# Altium PCB MAGI's7SegmentDisplay.PcbDoc
Units mil, origin at the board's own origin, x right, y up, seen from the top; angles counter-clockwise.
Board outline 6000 x 4000 mil, 2 copper layers (Top Layer, Bottom Layer); 16 components, 27 nets, 94 pads, 26 vias.
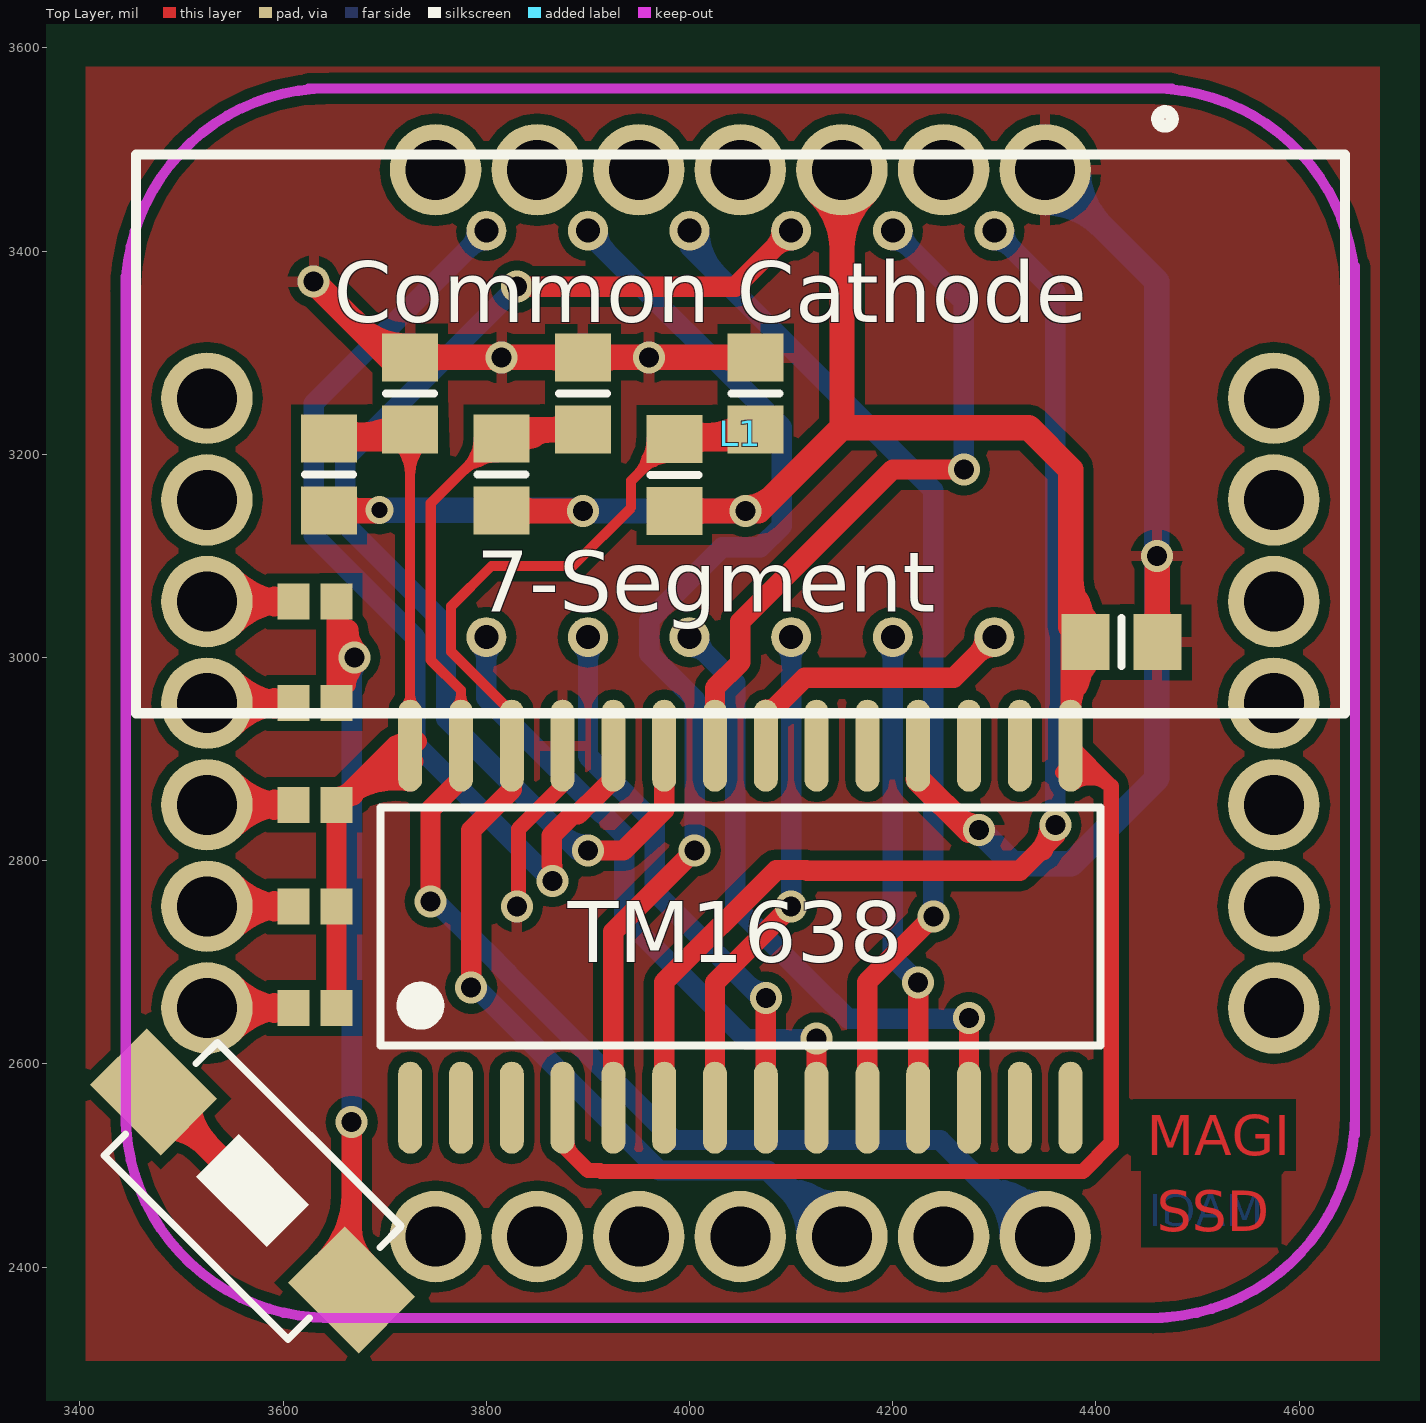
[diagram p0: Top Layer view]
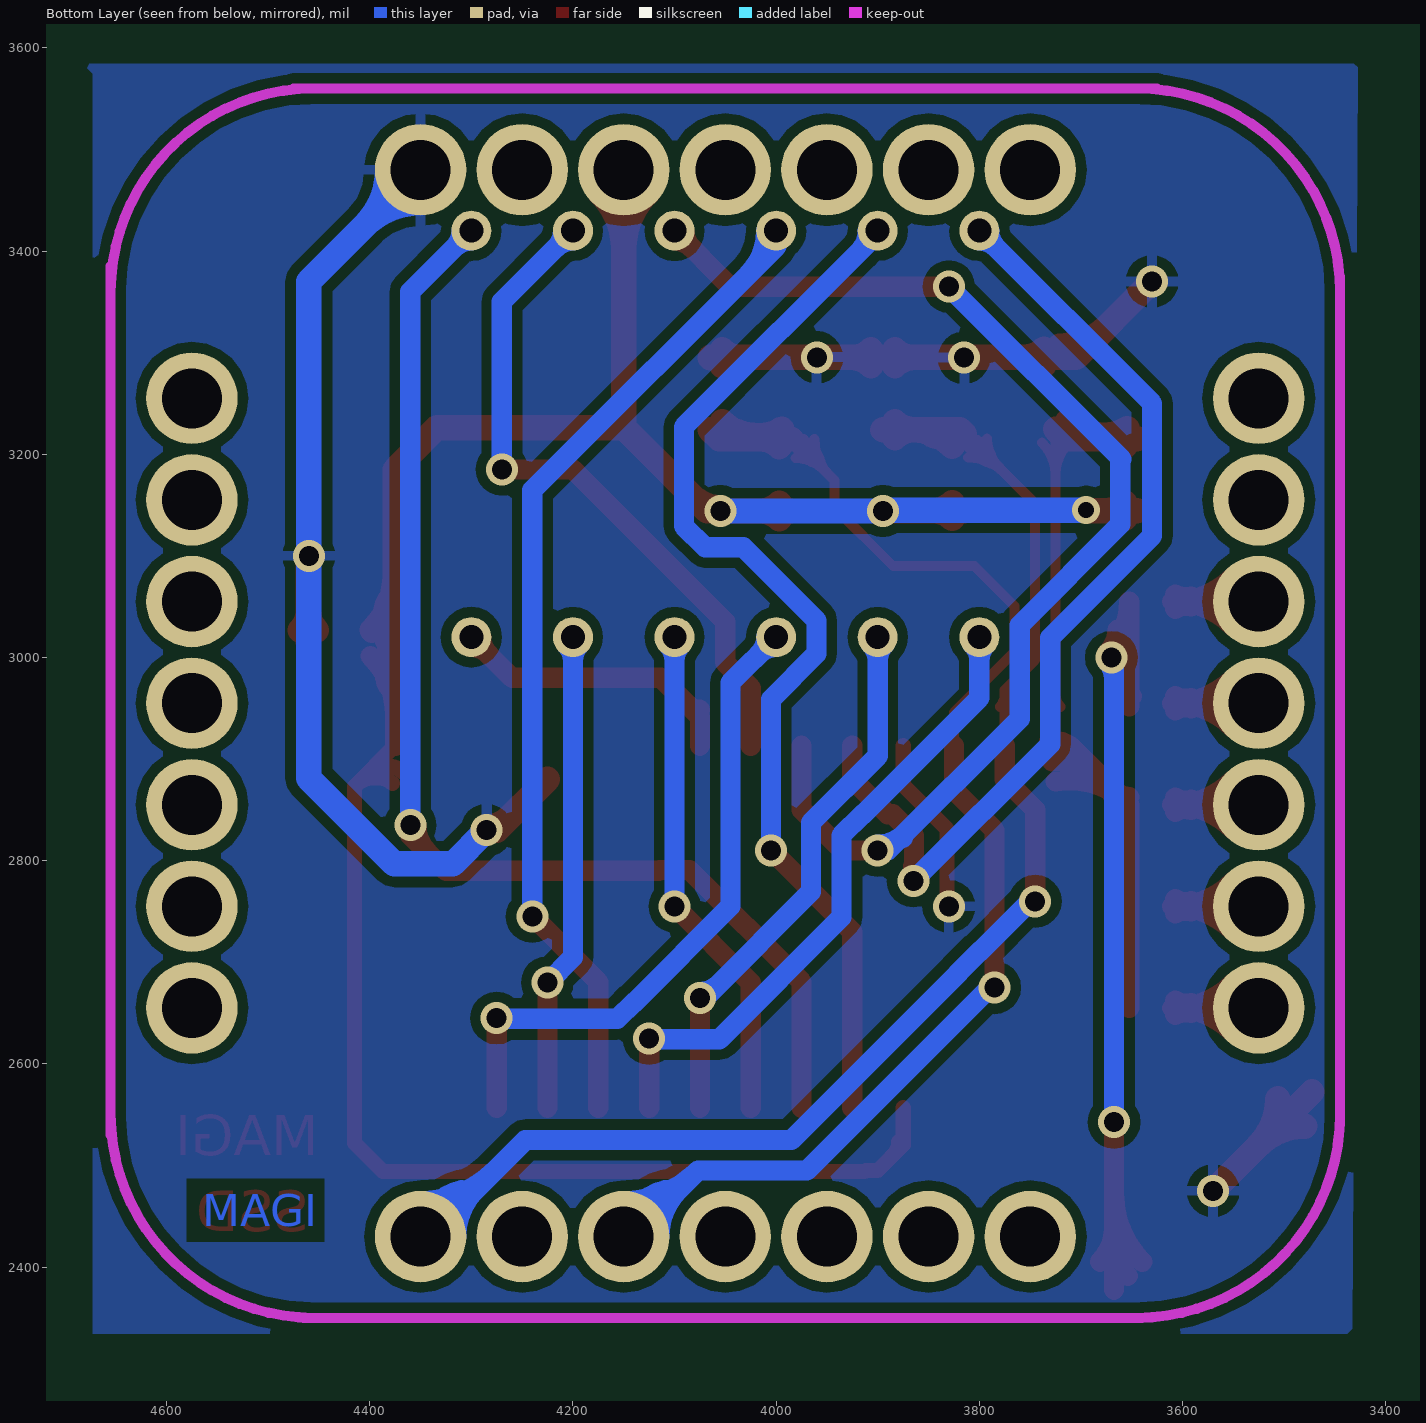
[diagram p1: Bottom Layer view, seen from below]

## Layer stack, top to bottom
Top Solder: solder mask 0.4, Solder Resist, Dk 3.5
Top Layer: signal copper 1.4
Dielectric1: dielectric 12.6, FR-4, Dk 4.8
Bottom Layer: signal copper 1.4
Bottom Solder: solder mask 0.4, Solder Resist, Dk 3.5

## Board outline
1000,1000 7000,1000 7000,5000 1000,5000

## Design rules (kind name [scope] priority, off if disabled: settings)
Clearance [All] p1: gap=10
PolygonConnect [All] p1: connectstyle=Relief reliefconductorwidth=10 reliefentries=4 polygonreliefangle="90 Angle" airgapwidth=10
RoutingVias [All] p1: holewidth=19.68 width=50 viastyle="Through Hole" minholewidth=11.81 minwidth=19.68 maxholewidth=3937.01 maxwidth=3937.01
SolderMaskExpansion [All] p1: expansion=4
Width [All] p1: maxlimit=100 minlimit=10 preferedwidth=30
29 further rules are at their usual default settings.

## Components (designator, comment, footprint, x,y, rotation, side; value= is the part's Value field where it differs from the comment)
C1 "CAP_1" 6-0805_N 3725,3260 r90 top
C2 "CAP_1" 6-0805_N 3895,3259.57 r270 top
C3 "CAP_1" 6-0805_N 4065,3259.57 r270 top
C4 "CAP_1" 6-0805_N 4425,3015 r0 top
J1 "MAGI-M8" MAGI-M8 4050,2955 r0 top
L1 "LED4" "0.36\"LED" 4050,3220 r0 top
R1 "RES1" 6-0805_N 3645,3180 r270 top
R2 "RES1" 6-0805_N 3815,3180 r270 top
R3 "RES1" 6-0805_N 3985,3179.57 r270 top
R4 "RES1" 1608[0603] 3625,2855 r180 top
R5 "RES1" 1608[0603] 3625,2755 r180 top
R6 "RES1" 1608[0603] 3625,2655 r180 top
R7 "RES1" 1608[0603] 3625,3055 r180 top
R8 "RES1" 1608[0603] 3625,2955 r180 top
S1 "SW-PB" SW-1-SMD 3570,2475 r45 top
U1 "TM1638" TM1638 4050,2735 r90 top

## Footprints (in the part's own frame and the unit in brackets; to place one, negate y for a bottom-side part, rotate by r counter-clockwise, add the part's x,y. Pads: shape width x height; smd on the part's side, far side on the other; paste and mask are expansions set on the pad)
"0.36\"LED" [mm]
  round 1 hole 0.6: 1(-6.35,-5.08) 2(-3.81,-5.08) 3(-1.27,-5.08) 4(1.27,-5.08) 5(3.81,-5.08) 6(6.35,-5.08) 7(6.35,5.08) 8(3.81,5.08) 9(1.27,5.08) 10(-1.27,5.08) 11(-3.81,5.08) 12(-6.35,5.08)
  silkscreen extent -15.11,-6.98 15.11,6.98
6-0805_N [mm] "Chip Resistor, Body 2.0x1.2mm, IPC Medium Density"
  rect 1.2x1.4 smd: 1(-0.9,0) 2(0.9,0)
  silkscreen extent 0,-0.6 0,0.6, body extent -1.07,-0.7 1.07,0.7, height 0.7
1608[0603] [mm] "Chip Capacitor, Body 1.6x0.8mm, IPC High Density"
  rect 0.8x0.9 smd: 1(-0.7,0) 2(0.381,0)
  body extent -0.87,-0.48 0.87,0.48, height 1.3
MAGI-M8 [mil]
  round 90 hole 59.06: 1(300,525) 2(200,525) 3(100,525) 4(0,525) 5(-100,525) 6(-200,525) 7(-300,525) 8(-525,300) 9(-525,200) 10(-525,100) 11(-525,0) 12(-525,-100) 13(-525,-200) 14(-525,-300) 15(-300,-525) 16(-200,-525) 17(-100,-525) 18(0,-525) 19(100,-525) 20(200,-525) 21(300,-525) 22(525,-300) 23(525,-200) 24(525,-100) 25(525,0) 26(525,100) 27(525,200) 28(525,300)
  Keep-Out Layer lines w10: -605,-415 -605,290 -605,420 ; -605,-405 ccw(c-405,-405) -405,-605 ; -605,405 cw(c-405,405) -405,605 ; -425,605 425,605 ; -410,-605 415,-605 ; 405,-605 ccw(c405,-405) 605,-405 ; 405,605 cw(c405,405) 605,405 ; 605,-425 605,430
SW-1-SMD [mm]
  rect 2x2.5 smd: 1(0,3.5) 2(0,-3.5)
  silkscreen extent -2,-3.25 2,3.25
TM1638 [mm] "SOIC, 28-Leads, Body 17.93x7.52mm, Pitch 1.27mm, IPC Medium Density"
  oval 2.3x0.6 smd: 1(-4.525,8.255) 2(-4.525,6.985) 3(-4.525,5.715) 4(-4.525,4.445) 5(-4.525,3.175) 6(-4.525,1.905) 7(-4.525,0.635) 8(-4.525,-0.635) 9(-4.525,-1.905) 10(-4.525,-3.175) 11(-4.525,-4.445) 12(-4.525,-5.715) 13(-4.525,-6.985) 14(-4.525,-8.255) 15(4.525,-8.255) 16(4.525,-6.985) 17(4.525,-5.715) 18(4.525,-4.445) 19(4.525,-3.175) 20(4.525,-1.905) 21(4.525,-0.635) 22(4.525,0.635) 23(4.525,1.905) 24(4.525,3.175) 25(4.525,4.445) 26(4.525,5.715) 27(4.525,6.985) 28(4.525,8.255)
  silkscreen extent -2.98,-9 2.98,9, body extent -3.8,-9 3.8,9, height 2.44

## Part data
C1 C2 C3 C4: "Capacitor"

## Via types
v1: diameter 31.5, hole 19.68, Top Layer to Bottom Layer, 25 vias
v2: diameter 27.56, hole 15.75, Top Layer to Bottom Layer, 1 vias

## Nets (pads, with @x,y where several pads share a name; then routed paths per layer and width w, separated by ;. In a path a pad name is that pad's centre, name@x,y a point inside that pad or via, vN(x,y) a via of type N, cw(c..) or ccw(c..) an arc to the next point about the centre after c; other vN are vias at no path point)
CLK: C2.2 J1.21 R2.1 U1.27 | length 3803.1
  Top Layer w10: U1.27 3775,2967.66 3745.31,2997.35 3745.31,3151.84 3813.47,3220 R2.1@3815,3220 ; U1.27@3770.18,2951.43 ccw(c3758.56,2963.06) 3775,2963.06 ; U1.27@3770.18,2951.43 ccw(c3758.56,2963.06) 3775,2963.06 ; U1.27@3770.18,2951.43 ccw(c3758.56,2963.06) 3775,2963.06 ; U1.27@3770.18,2951.43 ccw(c3758.56,2963.06) 3775,2963.06 ; 3775,2963.06 ccw(c3791.44,2963.06) U1.27@3779.82,2951.43 ; 3775,2963.06 ccw(c3791.44,2963.06) U1.27@3779.82,2951.43 ; 3775,2963.06 ccw(c3791.44,2963.06) U1.27@3779.82,2951.43 ; 3775,2963.06 ccw(c3791.44,2963.06) U1.27@3779.82,2951.43 ; 3775.59,3182.12 cw(c3811.06,3146.65) R2.1@3811.06,3196.81 ; 3775.59,3182.12 cw(c3811.06,3146.65) R2.1@3811.06,3196.81 ; 3775.59,3182.12 cw(c3811.06,3146.65) R2.1@3811.06,3196.81 ; 3775.59,3182.12 cw(c3811.06,3146.65) R2.1@3811.06,3196.81 ; 3780.8,3187.32 ccw(c3752.69,3215.43) R2.1@3792.44,3215.43 ; 3780.8,3187.32 ccw(c3752.69,3215.43) R2.1@3792.44,3215.43 ; 3780.8,3187.32 ccw(c3752.69,3215.43) R2.1@3792.44,3215.43 ; 3780.8,3187.32 ccw(c3752.69,3215.43) R2.1@3792.44,3215.43 ; 3787.05,3195.31 cw(c3815.54,3187.67) R2.1@3810.84,3216.79 ; 3787.05,3195.31 cw(c3815.54,3187.67) R2.1@3810.84,3216.79 ; 3787.05,3195.31 cw(c3815.54,3187.67) R2.1@3810.84,3216.79 ; 3787.05,3195.31 cw(c3815.54,3187.67) R2.1@3810.84,3216.79 ; 3787.05,3195.31 cw(c3815.54,3187.67) R2.1@3810.84,3216.79 ; 3787.05,3195.31 cw(c3815.54,3187.67) R2.1@3810.84,3216.79 ; 3788.58,3190.79 ccw(c3779.92,3223.1) R2.1@3812.4,3215.1 ; 3788.58,3190.79 ccw(c3779.92,3223.1) R2.1@3812.4,3215.1 ; 3788.58,3190.79 ccw(c3779.92,3223.1) R2.1@3812.4,3215.1 ; 3788.58,3190.79 ccw(c3779.92,3223.1) R2.1@3812.4,3215.1 ; 3788.58,3190.79 ccw(c3779.92,3223.1) R2.1@3812.4,3215.1 ; 3788.58,3190.79 ccw(c3779.92,3223.1) R2.1@3812.4,3215.1 ; R2.1@3792.66,3199.19 cw(c3811.06,3180.79) R2.1@3811.06,3206.81 ; R2.1@3792.66,3199.19 cw(c3811.06,3180.79) R2.1@3811.06,3206.81 ; R2.1@3792.66,3199.19 cw(c3811.06,3180.79) R2.1@3811.06,3206.81 ; R2.1@3792.66,3199.19 cw(c3811.06,3180.79) R2.1@3811.06,3206.81
  Top Layer w20: v1(3745,2760) 3745,2850 3775,2880 U1.27
  Top Layer w25: R2.1@3815,3220 3819.13,3224.13 C2.2 ; R2.1@3826.8,3207.57 cw(c3866.79,3167.58) 3866.79,3224.13 ; R2.1@3826.8,3207.57 cw(c3866.79,3167.58) 3866.79,3224.13 ; R2.1@3826.8,3207.57 cw(c3866.79,3167.58) 3866.79,3224.13 ; R2.1@3826.8,3207.57 cw(c3866.79,3167.58) 3866.79,3224.13 ; R2.1@3827.49,3222.55 ccw(c3839.18,3232.27) 3846.78,3219.1 ; R2.1@3827.49,3222.55 ccw(c3839.18,3232.27) 3846.78,3219.1 ; R2.1@3827.49,3222.55 ccw(c3839.18,3232.27) 3846.78,3219.1 ; R2.1@3827.49,3222.55 ccw(c3839.18,3232.27) 3846.78,3219.1 ; R2.1@3827.49,3222.55 ccw(c3839.18,3232.27) 3846.78,3219.1 ; R2.1@3827.49,3222.55 ccw(c3839.18,3232.27) 3846.78,3219.1 ; 3864.21,3224.13 cw(c3864.21,3197.28) C2.2@3883.2,3216.27 ; 3864.21,3224.13 ccw(c3864.21,3250.98) C2.2@3883.2,3232 ; 3864.21,3224.13 ccw(c3864.21,3250.98) C2.2@3883.2,3232 ; 3864.21,3224.13 cw(c3864.21,3197.28) C2.2@3883.2,3216.27 ; 3864.21,3224.13 ccw(c3864.21,3250.98) C2.2@3883.2,3232 ; 3864.21,3224.13 cw(c3864.21,3197.28) C2.2@3883.2,3216.27 ; 3864.21,3224.13 ccw(c3864.21,3250.98) C2.2@3883.2,3232 ; 3864.21,3224.13 cw(c3864.21,3197.28) C2.2@3883.2,3216.27
  Bottom Layer w20: v1@3745,2765 3799.25,2710.75 3799.81,2710.75 3820.75,2689.81 3820.75,2689.25 3985,2525 4246.92,2525 4341.92,2430 J1.21 ; 4276.46,2495.46 ccw(c4350,2569) J1.21@4350,2465 ; 4276.46,2495.46 ccw(c4350,2569) J1.21@4350,2465 ; 4276.46,2495.46 ccw(c4350,2569) J1.21@4350,2465 ; 4276.46,2495.46 ccw(c4350,2569) J1.21@4350,2465 ; 4295.96,2475.96 cw(c4250,2430) J1.21@4315,2430 ; 4295.96,2475.96 cw(c4250,2430) J1.21@4315,2430 ; 4295.96,2475.96 cw(c4250,2430) J1.21@4315,2430 ; 4295.96,2475.96 cw(c4250,2430) J1.21@4315,2430 ; 4309.64,2475.81 cw(c4293,2413.73) J1.21@4354.81,2431.37 ; 4309.64,2475.81 cw(c4293,2413.73) J1.21@4354.81,2431.37 ; 4309.64,2475.81 cw(c4293,2413.73) J1.21@4354.81,2431.37 ; 4309.64,2475.81 cw(c4293,2413.73) J1.21@4354.81,2431.37 ; 4309.64,2475.81 cw(c4293,2413.73) J1.21@4354.81,2431.37 ; 4309.64,2475.81 cw(c4293,2413.73) J1.21@4354.81,2431.37 ; 4310.61,2461.32 ccw(c4350,2500.71) J1.21@4350,2445 ; 4310.61,2461.32 ccw(c4350,2500.71) J1.21@4350,2445 ; 4310.61,2461.32 ccw(c4350,2500.71) J1.21@4350,2445 ; 4310.61,2461.32 ccw(c4350,2500.71) J1.21@4350,2445
DIO: C3.2 J1.19 R3.1 U1.26 | length 3966.3
  Top Layer w10: U1.26 3825,2945.95 3765.31,3005.63 3765.31,3050.31 3805,3090 3885,3090 3942.44,3147.44 3942.44,3173.97 3983.47,3215 R3.1 ; 3947.57,3179.1 ccw(c3911.66,3215) R3.1@3962.44,3215 ; 3947.57,3179.1 ccw(c3911.66,3215) R3.1@3962.44,3215 ; 3947.57,3179.1 ccw(c3911.66,3215) R3.1@3962.44,3215 ; 3947.57,3179.1 ccw(c3911.66,3215) R3.1@3962.44,3215 ; 3953.39,3184.91 cw(c3981.06,3157.24) R3.1@3981.06,3196.38 ; 3953.39,3184.91 cw(c3981.06,3157.24) R3.1@3981.06,3196.38 ; 3953.39,3184.91 cw(c3981.06,3157.24) R3.1@3981.06,3196.38 ; 3953.39,3184.91 cw(c3981.06,3157.24) R3.1@3981.06,3196.38 ; 3956.38,3192.37 cw(c3988.93,3183.65) R3.1@3980.73,3216.34 ; 3956.38,3192.37 cw(c3988.93,3183.65) R3.1@3980.73,3216.34 ; 3956.38,3192.37 cw(c3988.93,3183.65) R3.1@3980.73,3216.34 ; 3956.38,3192.37 cw(c3988.93,3183.65) R3.1@3980.73,3216.34 ; 3956.38,3192.37 cw(c3988.93,3183.65) R3.1@3980.73,3216.34 ; 3956.38,3192.37 cw(c3988.93,3183.65) R3.1@3980.73,3216.34 ; 3961.08,3191.02 ccw(c3953.5,3219.3) R3.1@3982.42,3214.79 ; 3961.08,3191.02 ccw(c3953.5,3219.3) R3.1@3982.42,3214.79 ; 3961.08,3191.02 ccw(c3953.5,3219.3) R3.1@3982.42,3214.79 ; 3961.08,3191.02 ccw(c3953.5,3219.3) R3.1@3982.42,3214.79 ; 3961.08,3191.02 ccw(c3953.5,3219.3) R3.1@3982.42,3214.79 ; 3961.08,3191.02 ccw(c3953.5,3219.3) R3.1@3982.42,3214.79 ; R3.1@3964.64,3196.17 ccw(c3945.81,3215) R3.1@3972.44,3215 ; R3.1@3964.64,3196.17 ccw(c3945.81,3215) R3.1@3972.44,3215 ; R3.1@3964.64,3196.17 ccw(c3945.81,3215) R3.1@3972.44,3215 ; R3.1@3964.64,3196.17 ccw(c3945.81,3215) R3.1@3972.44,3215
  Top Layer w20: v1@3785,2680 3785,2830 3825,2870 U1.26
  Top Layer w25: R3.1 4055.87,3215 C3.2 ; R3.1@3994.5,3224.63 ccw(c4018.19,3265.66) 4030.45,3219.9 ; R3.1@3994.5,3224.63 ccw(c4018.19,3265.66) 4030.45,3219.9 ; R3.1@3994.5,3224.63 ccw(c4018.19,3265.66) 4030.45,3219.9 ; R3.1@3994.5,3224.63 ccw(c4018.19,3265.66) 4030.45,3219.9 ; R3.1@3994.5,3224.63 ccw(c4018.19,3265.66) 4030.45,3219.9 ; R3.1@3994.5,3224.63 ccw(c4018.19,3265.66) 4030.45,3219.9 ; R3.1@3994.5,3224.63 ccw(c4018.19,3265.66) 4030.45,3219.9 ; R3.1@3994.5,3224.63 ccw(c4018.19,3265.66) 4030.45,3219.9 ; R3.1@3994.5,3224.63 ccw(c4018.19,3265.66) 4030.45,3219.9 ; R3.1@3996.8,3207.14 cw(c4015.79,3188.15) 4015.79,3215 ; R3.1@3996.8,3207.14 cw(c4015.79,3188.15) 4015.79,3215 ; R3.1@3996.8,3207.14 cw(c4015.79,3188.15) 4015.79,3215 ; R3.1@3996.8,3207.14 cw(c4015.79,3188.15) 4015.79,3215 ; R3.1@3996.8,3222.86 ccw(c4015.79,3241.85) 4015.79,3215 ; R3.1@3996.8,3222.86 ccw(c4015.79,3241.85) 4015.79,3215 ; R3.1@3996.8,3222.86 ccw(c4015.79,3241.85) 4015.79,3215 ; R3.1@3996.8,3222.86 ccw(c4015.79,3241.85) 4015.79,3215 ; R3.1@4012.17,3215 ccw(c4012.17,3273.03) C3.2@4053.2,3232 ; R3.1@4012.17,3215 ccw(c4012.17,3273.03) C3.2@4053.2,3232 ; R3.1@4012.17,3215 ccw(c4012.17,3273.03) C3.2@4053.2,3232 ; R3.1@4012.17,3215 ccw(c4012.17,3273.03) C3.2@4053.2,3232 ; 4032.56,3220.08 cw(c4040.62,3206.11) C3.2@4052.72,3216.78 ; 4032.56,3220.08 cw(c4040.62,3206.11) C3.2@4052.72,3216.78 ; 4032.56,3220.08 cw(c4040.62,3206.11) C3.2@4052.72,3216.78 ; 4032.56,3220.08 cw(c4040.62,3206.11) C3.2@4052.72,3216.78 ; 4032.56,3220.08 cw(c4040.62,3206.11) C3.2@4052.72,3216.78 ; 4032.56,3220.08 cw(c4040.62,3206.11) C3.2@4052.72,3216.78
  Bottom Layer w20: v1@3787.5,2677.5 3970,2495 4076.92,2495 4141.92,2430 J1.19 ; 4076.93,2495 ccw(c4149.35,2567.41) J1.19@4149.83,2465 ; 4076.93,2495 ccw(c4149.35,2567.41) J1.19@4149.83,2465 ; 4076.93,2495 ccw(c4149.35,2567.41) J1.19@4149.83,2465 ; 4076.93,2495 ccw(c4149.35,2567.41) J1.19@4149.83,2465 ; 4095.96,2475.96 cw(c4050,2430) J1.19@4115,2430 ; 4095.96,2475.96 cw(c4050,2430) J1.19@4115,2430 ; 4095.96,2475.96 cw(c4050,2430) J1.19@4115,2430 ; 4095.96,2475.96 cw(c4050,2430) J1.19@4115,2430 ; 4109.22,2475.67 cw(c4092.79,2413.16) J1.19@4154.8,2431.41 ; 4109.22,2475.67 cw(c4092.79,2413.16) J1.19@4154.8,2431.41 ; 4109.22,2475.67 cw(c4092.79,2413.16) J1.19@4154.8,2431.41 ; 4109.22,2475.67 cw(c4092.79,2413.16) J1.19@4154.8,2431.41 ; 4109.22,2475.67 cw(c4092.79,2413.16) J1.19@4154.8,2431.41 ; 4109.22,2475.67 cw(c4092.79,2413.16) J1.19@4154.8,2431.41 ; 4110.84,2461.08 ccw(c4149.67,2499.91) J1.19@4149.93,2445 ; 4110.84,2461.08 ccw(c4149.67,2499.91) J1.19@4149.93,2445 ; 4110.84,2461.08 ccw(c4149.67,2499.91) J1.19@4149.93,2445 ; 4110.84,2461.08 ccw(c4149.67,2499.91) J1.19@4149.93,2445
  other v1: 3785,2675
GND: C1.2 C2.1 C3.1 C4.2 J1.1 S1.1 U1.18 U1.25 | length 3123.7
  Top Layer w15: v1@3831.75,2761.75 3831.75,2831.2 3875,2874.45 U1.25
  Top Layer w25: S1.1 v1(3570,2475) ; S1.1@3479.52,2538.61 cw(c3479.52,2473.74) 3525.39,2519.61 cw(c3571.26,2565.48) S1.1@3506.39,2565.48 ; v1(3630,3370) 3704.57,3295.43 C1.2 v1(3960,3295.43) 4064.57,3295.43 C3.1 ; 3673.91,3326.09 ccw(c3721.06,3373.23) C1.2@3721.06,3306.56 ; C1.2@3736.8,3287.57 cw(c3755.79,3268.58) 3755.79,3295.43 cw(c3755.79,3322.28) C1.2@3736.8,3303.3 ; U1.18@4225,2880 4275,2830 v1(4285,2830) ; v1(4460,3100) 4460.43,3099.57 C4.2 ; 3863.16,3295.43 cw(c3863.16,3267.1) C2.1@3883.2,3287.14 ; 3863.16,3295.43 cw(c3863.16,3267.1) C2.1@3883.2,3287.14 ; 3863.16,3295.43 cw(c3863.16,3267.1) C2.1@3883.2,3287.14 ; 3863.16,3295.43 cw(c3863.16,3267.1) C2.1@3883.2,3287.14 ; 3865.26,3295.43 ccw(c3865.26,3320.8) C2.1@3883.2,3302.86 ; 3865.26,3295.43 ccw(c3865.26,3320.8) C2.1@3883.2,3302.86 ; 3865.26,3295.43 ccw(c3865.26,3320.8) C2.1@3883.2,3302.86 ; 3865.26,3295.43 ccw(c3865.26,3320.8) C2.1@3883.2,3302.86 ; C2.1@3906.8,3287.14 cw(c3926.84,3267.1) 3926.84,3295.43 ; C2.1@3906.8,3287.14 cw(c3926.84,3267.1) 3926.84,3295.43 ; C2.1@3906.8,3287.14 cw(c3926.84,3267.1) 3926.84,3295.43 ; C2.1@3906.8,3287.14 cw(c3926.84,3267.1) 3926.84,3295.43 ; C2.1@3906.8,3302.86 ccw(c3924.74,3320.8) 3924.74,3295.43 ; C2.1@3906.8,3302.86 ccw(c3924.74,3320.8) 3924.74,3295.43 ; C2.1@3906.8,3302.86 ccw(c3924.74,3320.8) 3924.74,3295.43 ; C2.1@3906.8,3302.86 ccw(c3924.74,3320.8) 3924.74,3295.43 ; 4033.16,3295.43 cw(c4033.16,3267.1) C3.1@4053.2,3287.14 ; 4033.16,3295.43 cw(c4033.16,3267.1) C3.1@4053.2,3287.14 ; 4033.16,3295.43 cw(c4033.16,3267.1) C3.1@4053.2,3287.14 ; 4033.16,3295.43 cw(c4033.16,3267.1) C3.1@4053.2,3287.14 ; 4035.26,3295.43 ccw(c4035.26,3320.8) C3.1@4053.2,3302.86 ; 4035.26,3295.43 ccw(c4035.26,3320.8) C3.1@4053.2,3302.86 ; 4035.26,3295.43 ccw(c4035.26,3320.8) C3.1@4053.2,3302.86 ; 4035.26,3295.43 ccw(c4035.26,3320.8) C3.1@4053.2,3302.86 ; 4262.38,2842.62 ccw(c4285,2865.23) v1@4285,2833.25 ; 4262.38,2842.62 ccw(c4285,2865.23) v1@4285,2833.25 ; 4262.38,2842.62 ccw(c4285,2865.23) v1@4285,2833.25 ; C4.2@4452.57,3026.8 ccw(c4433.58,3045.79) 4460.43,3045.79 ; C4.2@4452.57,3026.8 ccw(c4433.58,3045.79) 4460.43,3045.79 ; C4.2@4452.57,3026.8 ccw(c4433.58,3045.79) 4460.43,3045.79 ; C4.2@4452.57,3026.8 ccw(c4433.58,3045.79) 4460.43,3045.79 ; 4460.43,3045.79 ccw(c4487.28,3045.79) C4.2@4468.3,3026.8 ; 4460.43,3045.79 ccw(c4487.28,3045.79) C4.2@4468.3,3026.8 ; 4460.43,3045.79 ccw(c4487.28,3045.79) C4.2@4468.3,3026.8 ; 4460.43,3045.79 ccw(c4487.28,3045.79) C4.2@4468.3,3026.8
  Bottom Layer w25: v1(4285,2830) 4318.25,2796.75 4375.84,2796.75 4460,2880.91 v1(4460,3100) 4460,3370 J1.1 ; J1.1@4350,3447.5 cw(c4350,3369.04) 4405.48,3424.52 ; J1.1@4350,3447.5 cw(c4350,3369.04) 4405.48,3424.52 ; J1.1@4350,3447.5 cw(c4350,3369.04) 4405.48,3424.52 ; J1.1@4382.5,3480 ccw(c4460.96,3480) 4405.48,3424.52 ; J1.1@4382.5,3480 ccw(c4460.96,3480) 4405.48,3424.52 ; J1.1@4382.5,3480 ccw(c4460.96,3480) 4405.48,3424.52
  other v1: 3830,2755 3815,3295
GRID1: L1.12 U1.24 | length 1079.8
  Top Layer w20: v1(3865,2780) 3865,2794.44 3864.25,2795.19 3864.25,2824.81 3885.19,2845.75 3890.19,2845.75 3900.19,2855.75 3900.75,2855.75 3925,2880 U1.24
  Bottom Layer w20: L1.12 3630,3250 3630,3119.8 3730.31,3019.49 3730.31,2914.69 v1(3865,2780) ; 3783.47,3403.47 ccw(c3766.93,3420) L1.12@3790.32,3420 ; 3783.47,3403.47 cw(c3800,3386.93) L1.12@3800,3410.32 ; 3783.47,3403.47 ccw(c3766.93,3420) L1.12@3790.32,3420 ; 3783.47,3403.47 cw(c3800,3386.93) L1.12@3800,3410.32 ; 3783.47,3403.47 ccw(c3766.93,3420) L1.12@3790.32,3420 ; 3783.47,3403.47 cw(c3800,3386.93) L1.12@3800,3410.32
GRID2: L1.9 U1.23 | length 1471.8
  Top Layer w20: v1(3830,3365) 4045,3365 L1.9 ; v1(3900,2810) 3935,2810 3975,2850 U1.23 ; 4083.47,3403.47 ccw(c4066.93,3420) L1.9@4090.32,3420 ; 4083.47,3403.47 cw(c4100,3386.93) L1.9@4100,3410.32 ; 4083.47,3403.47 ccw(c4066.93,3420) L1.9@4090.32,3420 ; 4083.47,3403.47 cw(c4100,3386.93) L1.9@4100,3410.32 ; 4083.47,3403.47 ccw(c4066.93,3420) L1.9@4090.32,3420 ; 4083.47,3403.47 cw(c4100,3386.93) L1.9@4100,3410.32
  Bottom Layer w20: v1(3830,3365) 3660,3195 3661.22,3193.78 3661.22,3131.01 3760.31,3031.91 3760.31,2939.69 3890,2810 v1(3900,2810) ; 3883,2819.14 ccw(c3893.62,2829.76) v1@3898.24,2815.47 ; 3873.12,2826.88 ccw(c3900,2853.77) v1@3900,2815.75 ; 3873.12,2826.88 ccw(c3900,2853.77) v1@3900,2815.75 ; 3873.12,2826.88 ccw(c3900,2853.77) v1@3900,2815.75 ; 3875.09,2822.42 cw(c3866.59,2790.71) v1@3895.02,2807.13 ; 3875.09,2822.42 cw(c3866.59,2790.71) v1@3895.02,2807.13 ; 3875.09,2822.42 cw(c3866.59,2790.71) v1@3895.02,2807.13
GRID3: L1.8 U1.22 | length 788.5
  Top Layer w20: U1.22 4025,2970 4050,2995 4050,3035 4200,3185 v1(4270,3185)
  Bottom Layer w20: L1.8 4270,3350 v1(4270,3185) ; L1.8@4200,3410.32 cw(c4200,3386.93) 4216.53,3403.47 ; L1.8@4200,3410.32 cw(c4200,3386.93) 4216.53,3403.47 ; L1.8@4200,3410.32 cw(c4200,3386.93) 4216.53,3403.47 ; L1.8@4209.69,3420 ccw(c4233.07,3420) 4216.53,3403.47 ; L1.8@4209.69,3420 ccw(c4233.07,3420) 4216.53,3403.47 ; L1.8@4209.69,3420 ccw(c4233.07,3420) 4216.53,3403.47
GRID4: L1.6 U1.21 | length 434.9
  Top Layer w20: U1.21 4075,2941.6 4113.4,2980 4260,2980 L1.6 ; U1.21@4075,2948.43 ccw(c4075,2964.9) 4086.65,2953.25 ; U1.21@4075,2948.43 ccw(c4075,2964.9) 4086.65,2953.25 ; U1.21@4075,2948.43 ccw(c4075,2964.9) 4086.65,2953.25 ; 4283.47,3003.47 ccw(c4266.93,3020) L1.6@4290.31,3020 ; 4283.47,3003.47 cw(c4300,2986.93) L1.6@4300,3010.32 ; 4283.47,3003.47 ccw(c4266.93,3020) L1.6@4290.31,3020 ; 4283.47,3003.47 cw(c4300,2986.93) L1.6@4300,3010.32 ; 4283.47,3003.47 ccw(c4266.93,3020) L1.6@4290.31,3020 ; 4283.47,3003.47 cw(c4300,2986.93) L1.6@4300,3010.32
GRID5: U1.20
GRID6: U1.19
GRID7: U1.17
GRID8: U1.16
NetJ1_10: J1.10 R7.2 | length 812.1
  Top Layer w20: J1.10 R7.2 ; J1.10@3549.75,3030.25 cw(c3609.5,2970.5) R7.2@3609.5,3055 ; J1.10@3549.75,3030.25 cw(c3609.5,2970.5) R7.2@3609.5,3055 ; J1.10@3549.75,3030.25 cw(c3609.5,2970.5) R7.2@3609.5,3055 ; J1.10@3549.75,3030.25 cw(c3609.5,2970.5) R7.2@3609.5,3055 ; J1.10@3549.75,3079.75 ccw(c3609.5,3139.5) R7.2@3609.5,3055 ; J1.10@3549.75,3079.75 ccw(c3609.5,3139.5) R7.2@3609.5,3055 ; J1.10@3549.75,3079.75 ccw(c3609.5,3139.5) R7.2@3609.5,3055 ; J1.10@3549.75,3079.75 ccw(c3609.5,3139.5) R7.2@3609.5,3055 ; 3591.33,3050.13 cw(c3596.72,3030.03) R7.2@3607.13,3048.05 ; 3591.33,3050.13 cw(c3596.72,3030.03) R7.2@3607.13,3048.05 ; 3591.33,3050.13 cw(c3596.72,3030.03) R7.2@3607.13,3048.05 ; 3591.33,3050.13 cw(c3596.72,3030.03) R7.2@3607.13,3048.05 ; 3591.33,3050.13 cw(c3596.72,3030.03) R7.2@3607.13,3048.05 ; 3591.33,3050.13 cw(c3596.72,3030.03) R7.2@3607.13,3048.05 ; 3591.33,3059.87 ccw(c3596.72,3079.97) R7.2@3607.13,3061.95 ; 3591.33,3059.87 ccw(c3596.72,3079.97) R7.2@3607.13,3061.95 ; 3591.33,3059.87 ccw(c3596.72,3079.97) R7.2@3607.13,3061.95 ; 3591.33,3059.87 ccw(c3596.72,3079.97) R7.2@3607.13,3061.95 ; 3591.33,3059.87 ccw(c3596.72,3079.97) R7.2@3607.13,3061.95 ; 3591.33,3059.87 ccw(c3596.72,3079.97) R7.2@3607.13,3061.95
NetJ1_11: J1.11 R8.2 | length 812.1
  Top Layer w20: J1.11 R8.2 ; J1.11@3549.75,2930.25 cw(c3609.5,2870.5) R8.2@3609.5,2955 ; J1.11@3549.75,2930.25 cw(c3609.5,2870.5) R8.2@3609.5,2955 ; J1.11@3549.75,2930.25 cw(c3609.5,2870.5) R8.2@3609.5,2955 ; J1.11@3549.75,2930.25 cw(c3609.5,2870.5) R8.2@3609.5,2955 ; J1.11@3549.75,2979.75 ccw(c3609.5,3039.5) R8.2@3609.5,2955 ; J1.11@3549.75,2979.75 ccw(c3609.5,3039.5) R8.2@3609.5,2955 ; J1.11@3549.75,2979.75 ccw(c3609.5,3039.5) R8.2@3609.5,2955 ; J1.11@3549.75,2979.75 ccw(c3609.5,3039.5) R8.2@3609.5,2955 ; 3591.33,2950.13 cw(c3596.72,2930.03) R8.2@3607.13,2948.05 ; 3591.33,2950.13 cw(c3596.72,2930.03) R8.2@3607.13,2948.05 ; 3591.33,2950.13 cw(c3596.72,2930.03) R8.2@3607.13,2948.05 ; 3591.33,2950.13 cw(c3596.72,2930.03) R8.2@3607.13,2948.05 ; 3591.33,2950.13 cw(c3596.72,2930.03) R8.2@3607.13,2948.05 ; 3591.33,2950.13 cw(c3596.72,2930.03) R8.2@3607.13,2948.05 ; 3591.33,2959.87 ccw(c3596.72,2979.97) R8.2@3607.13,2961.95 ; 3591.33,2959.87 ccw(c3596.72,2979.97) R8.2@3607.13,2961.95 ; 3591.33,2959.87 ccw(c3596.72,2979.97) R8.2@3607.13,2961.95 ; 3591.33,2959.87 ccw(c3596.72,2979.97) R8.2@3607.13,2961.95 ; 3591.33,2959.87 ccw(c3596.72,2979.97) R8.2@3607.13,2961.95 ; 3591.33,2959.87 ccw(c3596.72,2979.97) R8.2@3607.13,2961.95
NetJ1_12: J1.12 R4.2 | length 812.1
  Top Layer w20: J1.12 R4.2 ; J1.12@3549.75,2830.25 cw(c3609.5,2770.5) R4.2@3609.5,2855 ; J1.12@3549.75,2830.25 cw(c3609.5,2770.5) R4.2@3609.5,2855 ; J1.12@3549.75,2830.25 cw(c3609.5,2770.5) R4.2@3609.5,2855 ; J1.12@3549.75,2830.25 cw(c3609.5,2770.5) R4.2@3609.5,2855 ; J1.12@3549.75,2879.75 ccw(c3609.5,2939.5) R4.2@3609.5,2855 ; J1.12@3549.75,2879.75 ccw(c3609.5,2939.5) R4.2@3609.5,2855 ; J1.12@3549.75,2879.75 ccw(c3609.5,2939.5) R4.2@3609.5,2855 ; J1.12@3549.75,2879.75 ccw(c3609.5,2939.5) R4.2@3609.5,2855 ; 3591.33,2850.13 cw(c3596.72,2830.03) R4.2@3607.13,2848.05 ; 3591.33,2850.13 cw(c3596.72,2830.03) R4.2@3607.13,2848.05 ; 3591.33,2850.13 cw(c3596.72,2830.03) R4.2@3607.13,2848.05 ; 3591.33,2850.13 cw(c3596.72,2830.03) R4.2@3607.13,2848.05 ; 3591.33,2850.13 cw(c3596.72,2830.03) R4.2@3607.13,2848.05 ; 3591.33,2850.13 cw(c3596.72,2830.03) R4.2@3607.13,2848.05 ; 3591.33,2859.87 ccw(c3596.72,2879.97) R4.2@3607.13,2861.95 ; 3591.33,2859.87 ccw(c3596.72,2879.97) R4.2@3607.13,2861.95 ; 3591.33,2859.87 ccw(c3596.72,2879.97) R4.2@3607.13,2861.95 ; 3591.33,2859.87 ccw(c3596.72,2879.97) R4.2@3607.13,2861.95 ; 3591.33,2859.87 ccw(c3596.72,2879.97) R4.2@3607.13,2861.95 ; 3591.33,2859.87 ccw(c3596.72,2879.97) R4.2@3607.13,2861.95
NetJ1_13: J1.13 R5.2 | length 812.1
  Top Layer w20: J1.13 R5.2 ; J1.13@3549.75,2730.25 cw(c3609.5,2670.5) R5.2@3609.5,2755 ; J1.13@3549.75,2730.25 cw(c3609.5,2670.5) R5.2@3609.5,2755 ; J1.13@3549.75,2730.25 cw(c3609.5,2670.5) R5.2@3609.5,2755 ; J1.13@3549.75,2730.25 cw(c3609.5,2670.5) R5.2@3609.5,2755 ; J1.13@3549.75,2779.75 ccw(c3609.5,2839.5) R5.2@3609.5,2755 ; J1.13@3549.75,2779.75 ccw(c3609.5,2839.5) R5.2@3609.5,2755 ; J1.13@3549.75,2779.75 ccw(c3609.5,2839.5) R5.2@3609.5,2755 ; J1.13@3549.75,2779.75 ccw(c3609.5,2839.5) R5.2@3609.5,2755 ; 3591.33,2750.13 cw(c3596.72,2730.03) R5.2@3607.13,2748.05 ; 3591.33,2750.13 cw(c3596.72,2730.03) R5.2@3607.13,2748.05 ; 3591.33,2750.13 cw(c3596.72,2730.03) R5.2@3607.13,2748.05 ; 3591.33,2750.13 cw(c3596.72,2730.03) R5.2@3607.13,2748.05 ; 3591.33,2750.13 cw(c3596.72,2730.03) R5.2@3607.13,2748.05 ; 3591.33,2750.13 cw(c3596.72,2730.03) R5.2@3607.13,2748.05 ; 3591.33,2759.87 ccw(c3596.72,2779.97) R5.2@3607.13,2761.95 ; 3591.33,2759.87 ccw(c3596.72,2779.97) R5.2@3607.13,2761.95 ; 3591.33,2759.87 ccw(c3596.72,2779.97) R5.2@3607.13,2761.95 ; 3591.33,2759.87 ccw(c3596.72,2779.97) R5.2@3607.13,2761.95 ; 3591.33,2759.87 ccw(c3596.72,2779.97) R5.2@3607.13,2761.95 ; 3591.33,2759.87 ccw(c3596.72,2779.97) R5.2@3607.13,2761.95
NetJ1_14: J1.14 R6.2 | length 812.1
  Top Layer w20: J1.14 R6.2 ; J1.14@3549.75,2630.25 cw(c3609.5,2570.5) R6.2@3609.5,2655 ; J1.14@3549.75,2630.25 cw(c3609.5,2570.5) R6.2@3609.5,2655 ; J1.14@3549.75,2630.25 cw(c3609.5,2570.5) R6.2@3609.5,2655 ; J1.14@3549.75,2630.25 cw(c3609.5,2570.5) R6.2@3609.5,2655 ; J1.14@3549.75,2679.75 ccw(c3609.5,2739.5) R6.2@3609.5,2655 ; J1.14@3549.75,2679.75 ccw(c3609.5,2739.5) R6.2@3609.5,2655 ; J1.14@3549.75,2679.75 ccw(c3609.5,2739.5) R6.2@3609.5,2655 ; J1.14@3549.75,2679.75 ccw(c3609.5,2739.5) R6.2@3609.5,2655 ; 3591.33,2650.13 cw(c3596.72,2630.03) R6.2@3607.13,2648.05 ; 3591.33,2650.13 cw(c3596.72,2630.03) R6.2@3607.13,2648.05 ; 3591.33,2650.13 cw(c3596.72,2630.03) R6.2@3607.13,2648.05 ; 3591.33,2650.13 cw(c3596.72,2630.03) R6.2@3607.13,2648.05 ; 3591.33,2650.13 cw(c3596.72,2630.03) R6.2@3607.13,2648.05 ; 3591.33,2650.13 cw(c3596.72,2630.03) R6.2@3607.13,2648.05 ; 3591.33,2659.87 ccw(c3596.72,2679.97) R6.2@3607.13,2661.95 ; 3591.33,2659.87 ccw(c3596.72,2679.97) R6.2@3607.13,2661.95 ; 3591.33,2659.87 ccw(c3596.72,2679.97) R6.2@3607.13,2661.95 ; 3591.33,2659.87 ccw(c3596.72,2679.97) R6.2@3607.13,2661.95 ; 3591.33,2659.87 ccw(c3596.72,2679.97) R6.2@3607.13,2661.95 ; 3591.33,2659.87 ccw(c3596.72,2679.97) R6.2@3607.13,2661.95
NetR7_1: R7.1 R8.1 S1.2 | length 2580.9
  Top Layer w20: R8.1 R7.1 ; 3664.55,2983.22 ccw(c3654.63,2990.51) v1@3665.11,2996.98 ; S1.2 v1(3667.44,2542.56) ; S1.2@3639.71,2405.29 ccw(c3572.77,2472.23) 3667.44,2472.23 ; S1.2@3639.71,2405.29 ccw(c3572.77,2472.23) 3667.44,2472.23 ; S1.2@3639.71,2405.29 ccw(c3572.77,2472.23) 3667.44,2472.23 ; S1.2@3639.71,2405.29 ccw(c3572.77,2472.23) 3667.44,2472.23 ; R8.1@3649.68,2961.95 ccw(c3640.44,2977.97) 3658.3,2973.18 ; R8.1@3649.68,2961.95 ccw(c3640.44,2977.97) 3658.3,2973.18 ; R8.1@3649.68,2961.95 ccw(c3640.44,2977.97) 3658.3,2973.18 ; R8.1@3649.68,2961.95 ccw(c3640.44,2977.97) 3658.3,2973.18 ; R8.1@3649.68,2961.95 ccw(c3640.44,2977.97) 3658.3,2973.18 ; R8.1@3649.68,2961.95 ccw(c3640.44,2977.97) 3658.3,2973.18 ; R8.1@3652.56,2951.74 cw(c3708.62,2951.74) v1@3673.59,2995.51 ; R8.1@3652.56,2951.74 cw(c3708.62,2951.74) v1@3673.59,2995.51 ; R8.1@3652.56,2951.74 cw(c3708.62,2951.74) v1@3673.59,2995.51 ; R8.1@3652.56,2951.74 cw(c3708.62,2951.74) v1@3673.59,2995.51 ; 3652.56,2993.36 cw(c3675.31,2993.36) v1@3661.09,3011.13 ; 3652.56,2993.36 cw(c3675.31,2993.36) v1@3661.09,3011.13 ; 3652.56,2993.36 cw(c3675.31,2993.36) v1@3661.09,3011.13 ; 3652.56,2993.36 cw(c3675.31,2993.36) v1@3661.09,3011.13 ; 3652.56,3007.56 ccw(c3677.37,3007.56) v1@3660.05,2989.8 ; 3652.56,3007.56 ccw(c3677.37,3007.56) v1@3660.05,2989.8 ; 3652.56,3007.56 ccw(c3677.37,3007.56) v1@3660.05,2989.8 ; 3652.56,3007.56 ccw(c3677.37,3007.56) v1@3660.05,2989.8 ; R7.1 ccw(c3723.62,3055) v1@3674.01,3004.12 ; R7.1 ccw(c3723.62,3055) v1@3674.01,3004.12 ; R7.1 ccw(c3723.62,3055) v1@3674.01,3004.12 ; R7.1 ccw(c3723.62,3055) v1@3674.01,3004.12 ; S1.2@3653.85,2391.15 ccw(c3621.05,2423.95) S1.2@3667.44,2423.95 ; S1.2@3653.85,2391.15 ccw(c3621.05,2423.95) S1.2@3667.44,2423.95 ; S1.2@3653.85,2391.15 ccw(c3621.05,2423.95) S1.2@3667.44,2423.95 ; S1.2@3653.85,2391.15 ccw(c3621.05,2423.95) S1.2@3667.44,2423.95 ; 3658.31,2974.73 ccw(c3631.86,2994.18) v1@3664.32,2999.13 ; 3658.31,2974.73 ccw(c3631.86,2994.18) v1@3664.32,2999.13 ; 3658.31,2974.73 ccw(c3631.86,2994.18) v1@3664.32,2999.13 ; 3658.31,2974.73 ccw(c3631.86,2994.18) v1@3664.32,2999.13 ; 3658.31,2974.73 ccw(c3631.86,2994.18) v1@3664.32,2999.13 ; 3658.31,2974.73 ccw(c3631.86,2994.18) v1@3664.32,2999.13 ; 3660.83,3026.29 cw(c3632.61,3009.51) v1@3664.43,3001.42 ; 3660.83,3026.29 cw(c3632.61,3009.51) v1@3664.43,3001.42 ; 3660.83,3026.29 cw(c3632.61,3009.51) v1@3664.43,3001.42 ; 3660.83,3026.29 cw(c3632.61,3009.51) v1@3664.43,3001.42 ; 3660.83,3026.29 cw(c3632.61,3009.51) v1@3664.43,3001.42 ; 3660.83,3026.29 cw(c3632.61,3009.51) v1@3664.43,3001.42 ; 3661.47,2973.5 cw(c3694.11,2969.88) v1@3673.59,2995.51 ; 3661.47,2973.5 cw(c3694.11,2969.88) v1@3673.59,2995.51 ; 3661.47,2973.5 cw(c3694.11,2969.88) v1@3673.59,2995.51 ; 3661.47,2973.5 cw(c3694.11,2969.88) v1@3673.59,2995.51 ; 3664.1,3027.21 ccw(c3696.93,3027.62) v1@3674.01,3004.12 ; 3664.1,3027.21 ccw(c3696.93,3027.62) v1@3674.01,3004.12 ; 3664.1,3027.21 ccw(c3696.93,3027.62) v1@3674.01,3004.12 ; 3664.1,3027.21 ccw(c3696.93,3027.62) v1@3674.01,3004.12 ; 3667.44,2438.63 ccw(c3714.58,2438.63) S1.2@3681.24,2405.29 ; 3667.44,2438.63 ccw(c3714.58,2438.63) S1.2@3681.24,2405.29 ; 3667.44,2438.63 ccw(c3714.58,2438.63) S1.2@3681.24,2405.29 ; 3667.44,2438.63 ccw(c3714.58,2438.63) S1.2@3681.24,2405.29
  Bottom Layer w20: v1(3667.44,2542.56) v1@3667.44,2990.12 ; 3667.44,2979.93 cw(c3690.07,2979.93) v1@3674.06,2995.94 ; 3667.44,2979.93 cw(c3690.07,2979.93) v1@3674.06,2995.94 ; 3667.44,2979.93 cw(c3690.07,2979.93) v1@3674.06,2995.94 ; 3667.44,2979.93 cw(c3690.07,2979.93) v1@3674.06,2995.94
  other v1: 3670,3000
SEG1: L1.11 U1.5 | length 1138.7
  Top Layer w20: U1.5 3925,2730 v1(4005,2810)
  Bottom Layer w20: L1.11 3900,3417.57 4090.75,3226.83 4090.75,3129.32 4069.81,3108.38 4032.26,3108.38 3960.31,3036.44 3960.31,3003.56 4005,2958.88 v1(4005,2810) ; L1.11@3909.68,3420 ccw(c3938.92,3420) 3918.25,3399.32 ; L1.11@3909.68,3420 ccw(c3938.92,3420) 3918.25,3399.32 ; L1.11@3909.68,3420 ccw(c3938.92,3420) 3918.25,3399.32
SEG2: L1.7 U1.6 | length 1482.6
  Top Layer w20: U1.6 3975,2680.56 4085.19,2790.75 4114.81,2790.75 4115.56,2790 4325,2790 4360,2825 v1(4360,2835) ; 4350.86,2818 ccw(c4340.24,2828.62) v1@4354.53,2833.24 ; 4343.12,2808.12 ccw(c4316.23,2835) v1@4354.25,2835 ; 4343.12,2808.12 ccw(c4316.23,2835) v1@4354.25,2835 ; 4343.12,2808.12 ccw(c4316.23,2835) v1@4354.25,2835 ; 4347.58,2810.09 cw(c4379.29,2801.59) v1@4362.87,2830.02 ; 4347.58,2810.09 cw(c4379.29,2801.59) v1@4362.87,2830.02 ; 4347.58,2810.09 cw(c4379.29,2801.59) v1@4362.87,2830.02
  Bottom Layer w20: L1.7 4360,3360 v1(4360,2835) ; L1.7@4300,3410.32 cw(c4300,3386.93) 4316.53,3403.47 ; L1.7@4300,3410.32 cw(c4300,3386.93) 4316.53,3403.47 ; L1.7@4300,3410.32 cw(c4300,3386.93) 4316.53,3403.47 ; L1.7@4309.69,3420 ccw(c4333.07,3420) 4316.53,3403.47 ; L1.7@4309.69,3420 ccw(c4333.07,3420) 4316.53,3403.47 ; L1.7@4309.69,3420 ccw(c4333.07,3420) 4316.53,3403.47
SEG3: L1.4 U1.7 | length 604.4
  Top Layer w20: U1.7 4025,2680 v1(4100,2755)
  Bottom Layer w20: v1(4100,2755) L1.4 ; L1.4@4093.15,3013.15 cw(c4076.62,2996.62) 4100,2996.62 ; L1.4@4093.15,3013.15 cw(c4076.62,2996.62) 4100,2996.62 ; L1.4@4093.15,3013.15 cw(c4076.62,2996.62) 4100,2996.62 ; 4100,2996.62 cw(c4123.38,2996.62) L1.4@4106.85,3013.15 ; 4100,2996.62 cw(c4123.38,2996.62) L1.4@4106.85,3013.15 ; 4100,2996.62 cw(c4123.38,2996.62) L1.4@4106.85,3013.15
SEG4: L1.2 U1.8 | length 697.8
  Top Layer w20: U1.8 v1(4075,2665)
  Bottom Layer w20: L1.2 3900,2902.98 3965.75,2837.23 3965.75,2769.25 v1@4065,2670 ; L1.2@3893.15,3013.15 cw(c3876.62,2996.62) 3900,2996.62 ; L1.2@3893.15,3013.15 cw(c3876.62,2996.62) 3900,2996.62 ; L1.2@3893.15,3013.15 cw(c3876.62,2996.62) 3900,2996.62 ; 3900,2996.62 cw(c3923.38,2996.62) L1.2@3906.85,3013.15 ; 3900,2996.62 cw(c3923.38,2996.62) L1.2@3906.85,3013.15 ; 3900,2996.62 cw(c3923.38,2996.62) L1.2@3906.85,3013.15 ; 4056.65,2678.35 ccw(c4075,2696.7) v1@4075,2670.75 ; 4056.65,2678.35 ccw(c4075,2696.7) v1@4075,2670.75 ; 4056.65,2678.35 ccw(c4075,2696.7) v1@4075,2670.75
SEG5: L1.1 U1.9 | length 749.9
  Top Layer w20: U1.9 v1(4125,2625)
  Bottom Layer w20: L1.1 3800,2960 3914.25,2845.75 3914.81,2845.75 3935.75,2824.81 3935.75,2744.25 4055.75,2624.25 4124.25,2624.25 v1(4125,2625) ; L1.1@3793.15,3013.15 cw(c3776.62,2996.62) 3800,2996.62 ; L1.1@3793.15,3013.15 cw(c3776.62,2996.62) 3800,2996.62 ; L1.1@3793.15,3013.15 cw(c3776.62,2996.62) 3800,2996.62 ; 3800,2996.62 cw(c3823.38,2996.62) L1.1@3806.85,3013.15 ; 3800,2996.62 cw(c3823.38,2996.62) L1.1@3806.85,3013.15 ; 3800,2996.62 cw(c3823.38,2996.62) L1.1@3806.85,3013.15
SEG6: L1.10 U1.10 | length 1133.2
  Top Layer w20: U1.10 4175,2680.56 v1@4239.72,2745.28
  Bottom Layer w20: L1.10 4000,3404.44 4240,3164.44 v1(4240,2745) ; L1.10@4009.68,3420 ccw(c4070.62,3420) 4027.53,3376.91 ; L1.10@4009.68,3420 ccw(c4070.62,3420) 4027.53,3376.91 ; L1.10@4009.68,3420 ccw(c4070.62,3420) 4027.53,3376.91
SEG7: L1.5 U1.11 | length 583.7
  Top Layer w20: U1.11 v1(4225,2680)
  Bottom Layer w20: L1.5 4200,2705 v1(4225,2680) ; L1.5@4193.15,3013.15 cw(c4176.62,2996.62) 4200,2996.62 ; L1.5@4193.15,3013.15 cw(c4176.62,2996.62) 4200,2996.62 ; L1.5@4193.15,3013.15 cw(c4176.62,2996.62) 4200,2996.62 ; 4200,2996.62 cw(c4223.38,2996.62) L1.5@4206.85,3013.15 ; 4200,2996.62 cw(c4223.38,2996.62) L1.5@4206.85,3013.15 ; 4200,2996.62 cw(c4223.38,2996.62) L1.5@4206.85,3013.15
SEG8: L1.3 U1.12 | length 758.2
  Top Layer w20: U1.12 v1(4275,2645)
  Bottom Layer w20: L1.3 4045,2975 4045,2755 4139.25,2660.75 4139.81,2660.75 4156.3,2644.25 4274.25,2644.25 v1(4275,2645) ; L1.3@4000,3010.32 cw(c4000,2986.93) 4016.53,3003.47 ; L1.3@4000,3010.32 cw(c4000,2986.93) 4016.53,3003.47 ; L1.3@4000,3010.32 cw(c4000,2986.93) 4016.53,3003.47 ; L1.3@4009.68,3020 ccw(c4033.07,3020) 4016.53,3003.47 ; L1.3@4009.68,3020 ccw(c4033.07,3020) 4016.53,3003.47 ; L1.3@4009.68,3020 ccw(c4033.07,3020) 4016.53,3003.47
STB: C1.1 R1.1 R4.1 R5.1 R6.1 U1.28 | length 2540
  Top Layer w10: U1.28 C1.1 ; C1.1@3711.83,3211.4 cw(c3680.04,3179.61) 3725,3179.61 ; C1.1@3711.83,3211.4 cw(c3680.04,3179.61) 3725,3179.61 ; C1.1@3711.83,3211.4 cw(c3680.04,3179.61) 3725,3179.61 ; C1.1@3711.83,3211.4 cw(c3680.04,3179.61) 3725,3179.61 ; U1.28@3720.18,2951.43 ccw(c3708.56,2963.06) 3725,2963.06 ; U1.28@3720.18,2951.43 ccw(c3708.56,2963.06) 3725,2963.06 ; U1.28@3720.18,2951.43 ccw(c3708.56,2963.06) 3725,2963.06 ; U1.28@3720.18,2951.43 ccw(c3708.56,2963.06) 3725,2963.06 ; 3725,2963.06 ccw(c3741.44,2963.06) U1.28@3729.82,2951.43 ; 3725,2963.06 ccw(c3741.44,2963.06) U1.28@3729.82,2951.43 ; 3725,2963.06 ccw(c3741.44,2963.06) U1.28@3729.82,2951.43 ; 3725,2963.06 ccw(c3741.44,2963.06) U1.28@3729.82,2951.43 ; 3725,3179.61 cw(c3769.96,3179.61) C1.1@3738.17,3211.4 ; 3725,3179.61 cw(c3769.96,3179.61) C1.1@3738.17,3211.4 ; 3725,3179.61 cw(c3769.96,3179.61) C1.1@3738.17,3211.4 ; 3725,3179.61 cw(c3769.96,3179.61) C1.1@3738.17,3211.4
  Top Layer w20: R6.1 R5.1 R4.1 ; 3707.16,2909.6 cw(c3726.77,2889.98) U1.28@3731.48,2917.32 ; U1.28 3710.71,2913.15 R4.1 ; R4.1 cw(c3710.73,2796.84) U1.28@3724.69,2877.9 ; R4.1 cw(c3710.73,2796.84) U1.28@3724.69,2877.9 ; R4.1 cw(c3710.73,2796.84) U1.28@3724.69,2877.9 ; R4.1 cw(c3710.73,2796.84) U1.28@3724.69,2877.9 ; R4.1@3652.56,2862.72 ccw(c3652.56,2881.35) R4.1@3665.73,2868.17 ; R4.1@3652.56,2862.72 ccw(c3652.56,2881.35) R4.1@3665.73,2868.17 ; R4.1@3652.56,2862.72 ccw(c3652.56,2881.35) R4.1@3665.73,2868.17 ; R4.1@3652.56,2862.72 ccw(c3652.56,2881.35) R4.1@3665.73,2868.17 ; R4.1@3654.05,2862.52 ccw(c3659.14,2881.54) 3668.99,2864.49 ; R4.1@3654.05,2862.52 ccw(c3659.14,2881.54) 3668.99,2864.49 ; R4.1@3654.05,2862.52 ccw(c3659.14,2881.54) 3668.99,2864.49 ; R4.1@3654.05,2862.52 ccw(c3659.14,2881.54) 3668.99,2864.49 ; R4.1@3654.05,2862.52 ccw(c3659.14,2881.54) 3668.99,2864.49 ; R4.1@3654.05,2862.52 ccw(c3659.14,2881.54) 3668.99,2864.49 ; R4.1@3654.05,2862.52 ccw(c3659.14,2881.54) 3668.99,2864.49 ; 3679.86,2882.3 cw(c3718.75,2843.41) U1.28@3728.09,2897.61 ; 3679.86,2882.3 cw(c3718.75,2843.41) U1.28@3728.09,2897.61 ; 3679.86,2882.3 cw(c3718.75,2843.41) U1.28@3728.09,2897.61 ; 3679.86,2882.3 cw(c3718.75,2843.41) U1.28@3728.09,2897.61
  Top Layer w25: R1.1 3715.87,3215.43 C1.1 ; R1.1@3654.5,3225.07 ccw(c3678.18,3266.09) 3690.45,3220.33 ; R1.1@3654.5,3225.07 ccw(c3678.18,3266.09) 3690.45,3220.33 ; R1.1@3654.5,3225.07 ccw(c3678.18,3266.09) 3690.45,3220.33 ; R1.1@3654.5,3225.07 ccw(c3678.18,3266.09) 3690.45,3220.33 ; R1.1@3654.5,3225.07 ccw(c3678.18,3266.09) 3690.45,3220.33 ; R1.1@3654.5,3225.07 ccw(c3678.18,3266.09) 3690.45,3220.33 ; R1.1@3654.5,3225.07 ccw(c3678.18,3266.09) 3690.45,3220.33 ; R1.1@3656.8,3207.57 cw(c3675.79,3188.58) 3675.79,3215.43 ; R1.1@3656.8,3207.57 cw(c3675.79,3188.58) 3675.79,3215.43 ; R1.1@3656.8,3207.57 cw(c3675.79,3188.58) 3675.79,3215.43 ; R1.1@3656.8,3207.57 cw(c3675.79,3188.58) 3675.79,3215.43 ; R1.1@3656.8,3223.3 ccw(c3675.79,3242.28) 3675.79,3215.43 ; R1.1@3656.8,3223.3 ccw(c3675.79,3242.28) 3675.79,3215.43 ; R1.1@3656.8,3223.3 ccw(c3675.79,3242.28) 3675.79,3215.43 ; R1.1@3656.8,3223.3 ccw(c3675.79,3242.28) 3675.79,3215.43 ; R1.1@3672.16,3215.43 ccw(c3672.16,3273.47) C1.1@3713.2,3232.43 ; R1.1@3672.16,3215.43 ccw(c3672.16,3273.47) C1.1@3713.2,3232.43 ; R1.1@3672.16,3215.43 ccw(c3672.16,3273.47) C1.1@3713.2,3232.43 ; R1.1@3672.16,3215.43 ccw(c3672.16,3273.47) C1.1@3713.2,3232.43 ; 3692.55,3220.51 cw(c3700.62,3206.54) C1.1@3712.72,3217.21 ; 3692.55,3220.51 cw(c3700.62,3206.54) C1.1@3712.72,3217.21 ; 3692.55,3220.51 cw(c3700.62,3206.54) C1.1@3712.72,3217.21 ; 3692.55,3220.51 cw(c3700.62,3206.54) C1.1@3712.72,3217.21 ; 3692.55,3220.51 cw(c3700.62,3206.54) C1.1@3712.72,3217.21 ; 3692.55,3220.51 cw(c3700.62,3206.54) C1.1@3712.72,3217.21
VCC: C4.1 J1.3 R1.2 R2.2 R3.2 U1.4 U1.15 | length 4990.6
  Top Layer w15: U1.4 3875,2520 3900,2495 3911.93,2495 3912.86,2494.07 4387.14,2494.07 4415,2521.93 4415,2873.15 ; U1.15 4415,2873.15 ; U1.15@4375.97,2892.01 cw(c4384.03,2867.14) 4402.52,2885.63 ; U1.4@3879.31,2523.39 ccw(c3897.89,2523.39) 3884.75,2510.25 ; U1.4@3879.31,2523.39 ccw(c3897.89,2523.39) 3884.75,2510.25 ; U1.4@3879.31,2523.39 ccw(c3897.89,2523.39) 3884.75,2510.25 ; U1.4@3879.31,2523.39 ccw(c3897.89,2523.39) 3884.75,2510.25 ; U1.15@4367.06,2886.84 cw(c4378.98,2876.09) U1.15@4378.16,2892.13 ; U1.15@4367.06,2886.84 cw(c4378.98,2876.09) U1.15@4378.16,2892.13 ; U1.15@4367.06,2886.84 cw(c4378.98,2876.09) U1.15@4378.16,2892.13 ; U1.15@4368.76,2888.36 cw(c4384.03,2867.14) 4402.52,2885.63 ; U1.15@4368.76,2888.36 cw(c4384.03,2867.14) 4402.52,2885.63 ; U1.15@4368.76,2888.36 cw(c4384.03,2867.14) 4402.52,2885.63 ; U1.15@4377.52,2876.19 cw(c4394.47,2852.63) 4415,2873.15 ; U1.15@4377.52,2876.19 cw(c4394.47,2852.63) 4415,2873.15 ; U1.15@4377.52,2876.19 cw(c4394.47,2852.63) 4415,2873.15 ; U1.15@4377.52,2876.19 cw(c4394.47,2852.63) 4415,2873.15
  Top Layer w20: U1.15 C4.1@4375,3030 ; U1.15@4375,2943.01 cw(c4457.63,2943.01) C4.1@4399.2,3001.43 ; U1.15@4375,2943.01 cw(c4457.63,2943.01) C4.1@4399.2,3001.43 ; U1.15@4375,2943.01 cw(c4457.63,2943.01) C4.1@4399.2,3001.43 ; U1.15@4375,2943.01 cw(c4457.63,2943.01) C4.1@4399.2,3001.43 ; C4.1@4375,2991.29 cw(c4409.34,2991.29) C4.1@4385.06,3015.57 ; C4.1@4375,2991.29 cw(c4409.34,2991.29) C4.1@4385.06,3015.57 ; C4.1@4375,2991.29 cw(c4409.34,2991.29) C4.1@4385.06,3015.57 ; C4.1@4375,2991.29 cw(c4409.34,2991.29) C4.1@4385.06,3015.57 ; C4.1@4379.04,3002.42 cw(c4357.6,2984.83) 4381.61,2970.97 ; C4.1@4379.04,3002.42 cw(c4357.6,2984.83) 4381.61,2970.97 ; C4.1@4379.04,3002.42 cw(c4357.6,2984.83) 4381.61,2970.97 ; C4.1@4379.04,3002.42 cw(c4357.6,2984.83) 4381.61,2970.97 ; C4.1@4379.04,3002.42 cw(c4357.6,2984.83) 4381.61,2970.97 ; C4.1@4379.04,3002.42 cw(c4357.6,2984.83) 4381.61,2970.97
  Top Layer w25: R1.2 3694.57,3144.57 v2(3695,3145) ; R2.2@3815,3144.13 v1(3895,3144.13) ; R3.2 v1(4055,3144.13) 4068,3144.13 4150,3226.13 ; J1.3 4150,3226.13 ; C4.1@4375,3030 4375,3185 4333.87,3226.13 4150,3226.13 ; R1.2@3656.8,3136.7 cw(c3675.79,3117.72) 3675.79,3144.57 ; R1.2@3656.8,3136.7 cw(c3675.79,3117.72) 3675.79,3144.57 ; R1.2@3656.8,3136.7 cw(c3675.79,3117.72) 3675.79,3144.57 ; R1.2@3656.8,3136.7 cw(c3675.79,3117.72) 3675.79,3144.57 ; R1.2@3656.8,3152.43 ccw(c3675.79,3171.42) 3675.79,3144.57 ; R1.2@3656.8,3152.43 ccw(c3675.79,3171.42) 3675.79,3144.57 ; R1.2@3656.8,3152.43 ccw(c3675.79,3171.42) 3675.79,3144.57 ; R1.2@3656.8,3152.43 ccw(c3675.79,3171.42) 3675.79,3144.57 ; R2.2@3826.8,3136.7 cw(c3844.74,3118.76) 3844.74,3144.13 ; R2.2@3826.8,3136.7 cw(c3844.74,3118.76) 3844.74,3144.13 ; R2.2@3826.8,3136.7 cw(c3844.74,3118.76) 3844.74,3144.13 ; R2.2@3826.8,3136.7 cw(c3844.74,3118.76) 3844.74,3144.13 ; R2.2@3826.8,3152.43 ccw(c3846.84,3172.46) 3846.84,3144.13 ; R2.2@3826.8,3152.43 ccw(c3846.84,3172.46) 3846.84,3144.13 ; R2.2@3826.8,3152.43 ccw(c3846.84,3172.46) 3846.84,3144.13 ; R2.2@3826.8,3152.43 ccw(c3846.84,3172.46) 3846.84,3144.13 ; R3.2@3996.8,3136.27 cw(c4015.79,3117.28) 4015.79,3144.13 ; R3.2@3996.8,3136.27 cw(c4015.79,3117.28) 4015.79,3144.13 ; R3.2@3996.8,3136.27 cw(c4015.79,3117.28) 4015.79,3144.13 ; R3.2@3996.8,3136.27 cw(c4015.79,3117.28) 4015.79,3144.13 ; R3.2@3996.8,3152 ccw(c4015.79,3170.98) 4015.79,3144.13 ; R3.2@3996.8,3152 ccw(c4015.79,3170.98) 4015.79,3144.13 ; R3.2@3996.8,3152 ccw(c4015.79,3170.98) 4015.79,3144.13 ; R3.2@3996.8,3152 ccw(c4015.79,3170.98) 4015.79,3144.13 ; v1@4055,3147.38 ccw(c4055,3186.61) 4082.74,3158.87 ; v1@4055,3147.38 ccw(c4055,3186.61) 4082.74,3158.87 ; v1@4055,3147.38 ccw(c4055,3186.61) 4082.74,3158.87 ; v1@4055,3147.38 ccw(c4055,3186.61) 4082.74,3158.87 ; J1.3@4127.02,3457.02 cw(c4071.54,3401.54) 4150,3401.54 ; J1.3@4127.02,3457.02 cw(c4071.54,3401.54) 4150,3401.54 ; J1.3@4127.02,3457.02 cw(c4071.54,3401.54) 4150,3401.54 ; J1.3@4127.02,3457.02 cw(c4071.54,3401.54) 4150,3401.54 ; 4150,3401.54 cw(c4228.46,3401.54) J1.3@4172.98,3457.02 ; 4150,3401.54 cw(c4228.46,3401.54) J1.3@4172.98,3457.02 ; 4150,3401.54 cw(c4228.46,3401.54) J1.3@4172.98,3457.02 ; 4150,3401.54 cw(c4228.46,3401.54) J1.3@4172.98,3457.02 ; 4375,3080.96 ccw(c4451.59,3080.96) C4.1@4397.43,3026.8 ; 4375,3080.96 ccw(c4451.59,3080.96) C4.1@4397.43,3026.8 ; 4375,3080.96 ccw(c4451.59,3080.96) C4.1@4397.43,3026.8 ; 4375,3080.96 ccw(c4451.59,3080.96) C4.1@4397.43,3026.8 ; C4.1@4380.15,3024.85 ccw(c4354.75,3040.77) 4380.71,3055.76 ; C4.1@4380.15,3024.85 ccw(c4354.75,3040.77) 4380.71,3055.76 ; C4.1@4380.15,3024.85 ccw(c4354.75,3040.77) 4380.71,3055.76 ; C4.1@4380.15,3024.85 ccw(c4354.75,3040.77) 4380.71,3055.76 ; C4.1@4380.15,3024.85 ccw(c4354.75,3040.77) 4380.71,3055.76 ; C4.1@4380.15,3024.85 ccw(c4354.75,3040.77) 4380.71,3055.76
  Bottom Layer w25: v2(3695,3145) v1@3890,3145 ; v1@3889.13,3144.13 v1(4055,3144.13)
pads on no net: J1.2 J1.4 J1.5 J1.6 J1.7 J1.8 J1.9 J1.15 J1.16 J1.17 J1.18 J1.20 J1.22 J1.23 J1.24 J1.25 J1.26 J1.27 J1.28 U1.1 U1.2 U1.3 U1.13 U1.14

## Polygon pours and split planes (outlines as drawn)
GND on Top Layer "Top Layer-No Net" (solid, pour order 2): 3405.72,3581.43 4679.5,3581.43 4679.5,2307.66 3405.72,2307.66
GND on Bottom Layer "Top Layer-No Net" (solid, pour order 4): 3427.74,3584.31 4682.74,3584.31 4672.74,3574.31 4672.74,2334.31 3437.74,2334.31 3432.74,2339.31

## Other copper
Top Layer:
  text "MAGI" at 4450,2510 h39.37
  text "SSD" at 4460,2435 h40
Bottom Layer:
  text "MAGI" at 4565,2440 h31.5

## Silkscreen, mask and mechanical layers (free items; w line width, h text height)
Top Overlay:
  circle w13: c4467.93,3530 r7.07
  text "Common Cathode" at 3650,3330 h60
  text "7-Segment" at 3790,3045 h60
  text "TM1638" at 3880,2700 h60